# Altium PCB 驱动板PCB.PcbDoc
Units mil, origin at the board's own origin, x right, y up, seen from the top; angles counter-clockwise.
Board outline 3955.03 x 2772.03 mil, 2 copper layers (Top Layer, Bottom Layer); 5 components, 29 nets, 126 pads, 119 vias.
Unrouted connection lines stored in the file: 15.
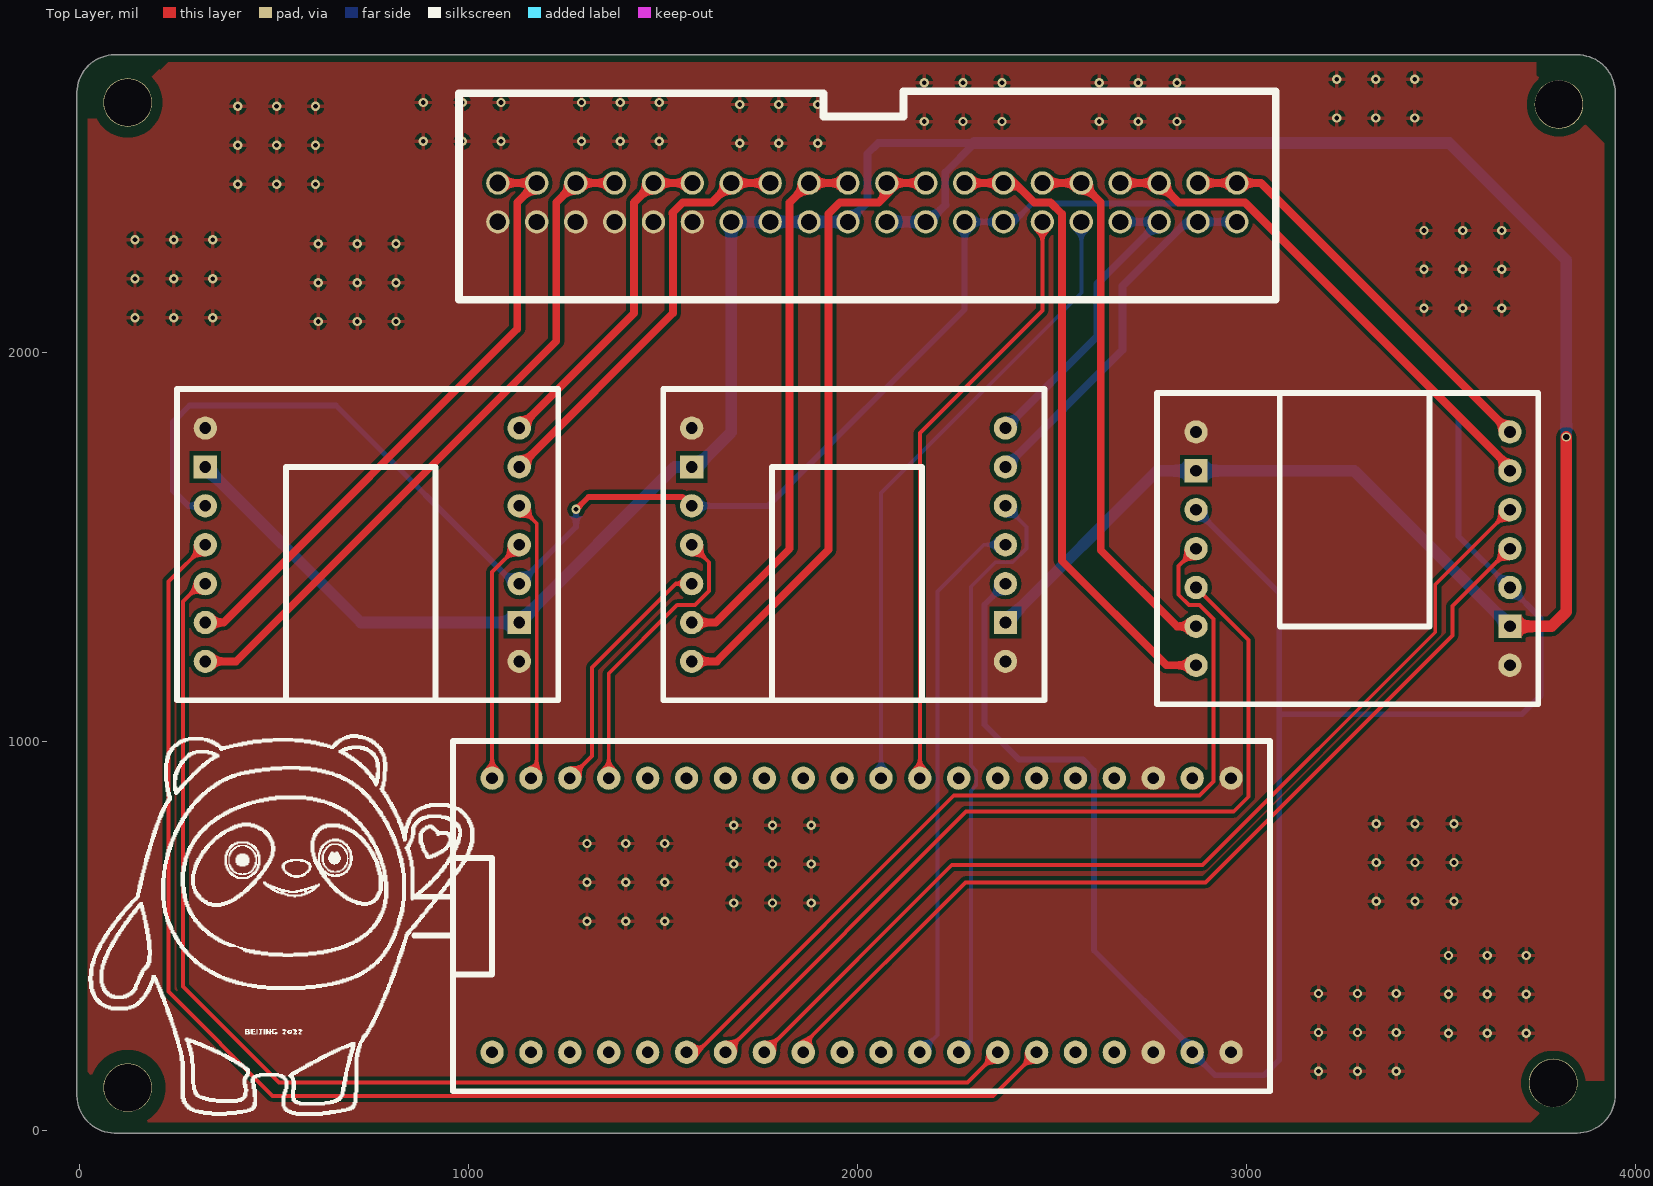
[diagram p0: Top Layer view]
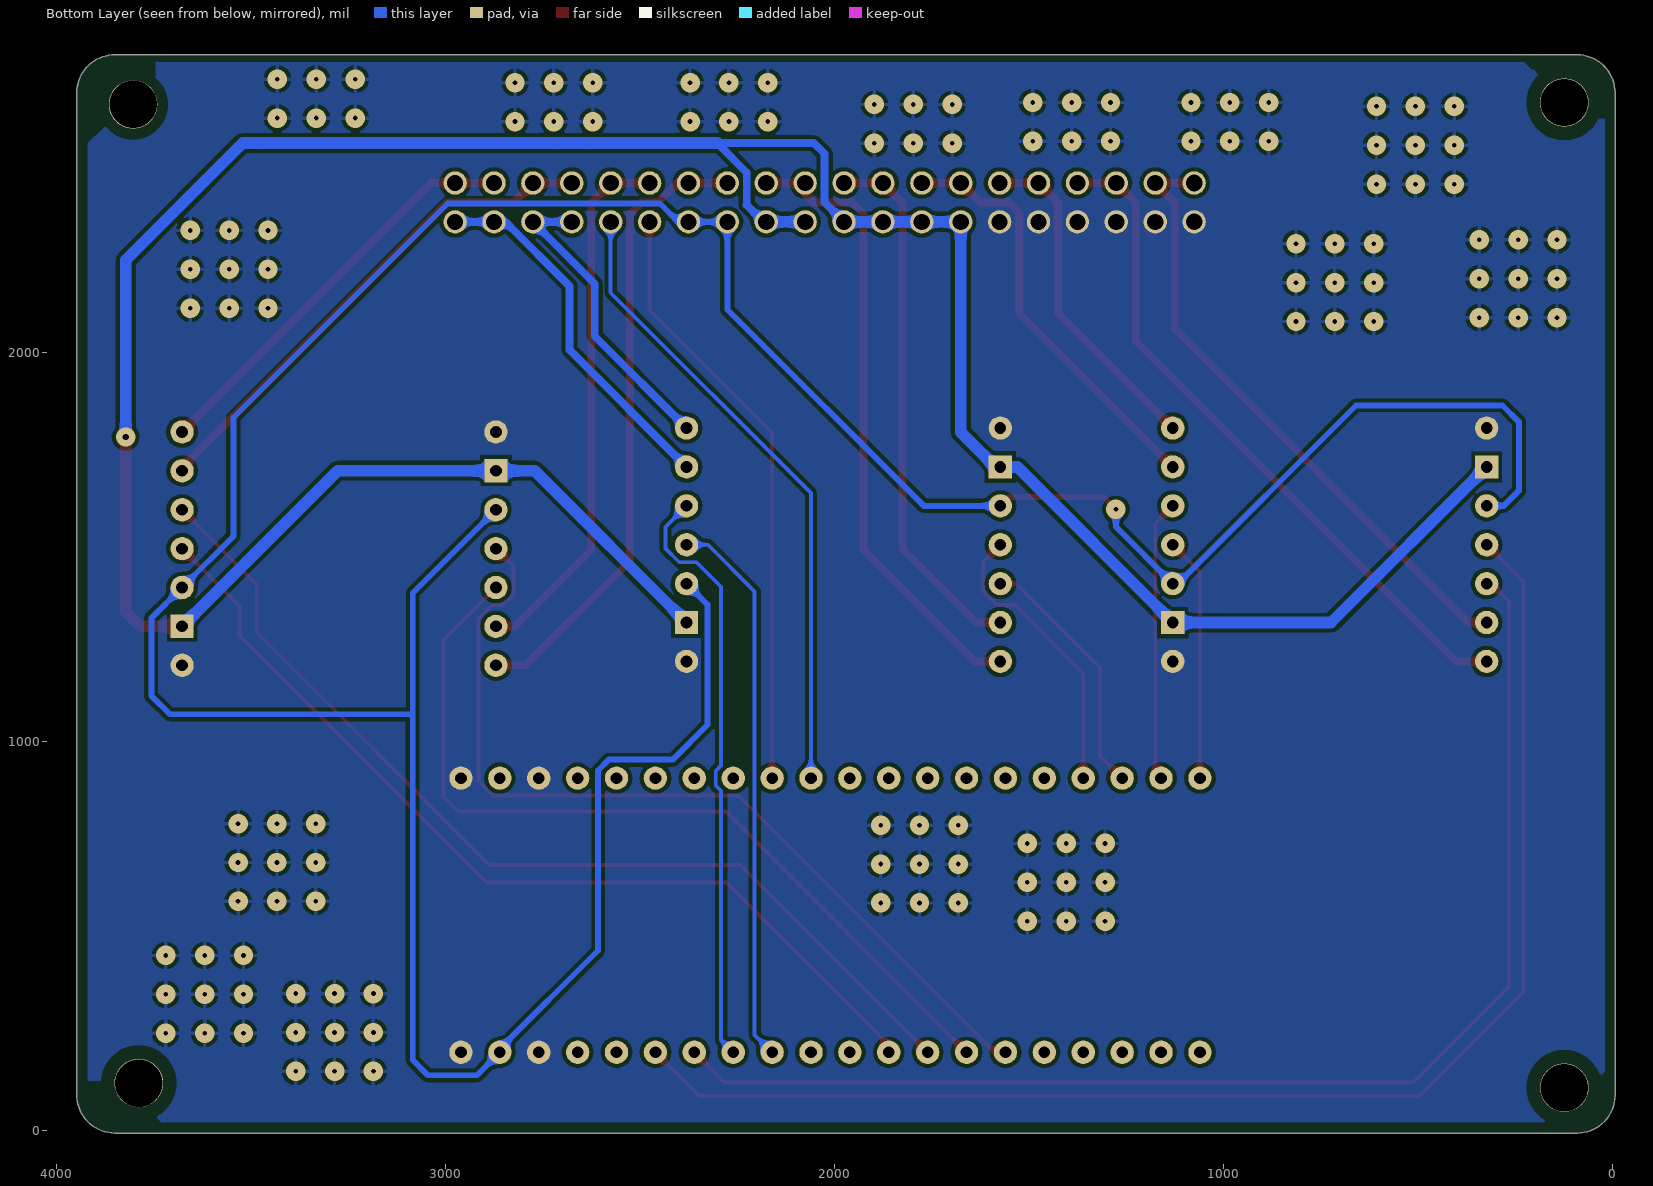
[diagram p1: Bottom Layer view, seen from below]

## Layer stack, top to bottom
Top Solder: solder mask 0.4, Solder Resist, Dk 3.5
Top Layer: signal copper 1.4
Dielectric 1: dielectric 12.6, FR-4, Dk 4.8
Bottom Layer: signal copper 1.4
Bottom Solder: solder mask 0.4, Solder Resist, Dk 3.5

## Board outline
88.62,-7.51 cw(c90,90) -7.51,88.62 cw(c0,89) -7.51,89 -7.52,2668 cw(c0,2668) -7.51,2668.39 cw(c90,2667) 90,2764.51 cw(c90,2757) 91.68,2764.33 3848.32,2764.33 cw(c3850,2757) 3850,2764.51 cw(c3850,2667) 3947.51,2667 cw(c3940,2667) 3947.51,2666.96 3947.51,90 cw(c3850,90) 3850.04,-7.51 cw(c3850,90) 3850,-7.51 ccw(c3850,0) 3850.04,-7.51 3850,-7.51 89,-7.51 cw(c89,0)

## Design rules (kind name [scope] priority, off if disabled: settings)
Clearance [All] p1: gap=10 ignorepadtopadclearanceinfootprint=FALSE except(0: Arc-Hole Track-Hole SMDPad-Hole THPad-Hole Via-Hole Fill-Hole Poly-Hole Region-Hole Text-Hole)
HoleSize [All] p1: absolutevalues=TRUE maxlimit=150 minlimit=1 maxpercent=80.000 minpercent=20.000
PolygonConnect PolygonConnect_1 [All] p1: thpad.connectstyle=Direct thpad.reliefconductorwidth=10 thpad.reliefentries=4 thpad.polygonreliefangle="90 Angle" thpad.airgapwidth=10 smdpad.connectstyle=Relief smdpad.reliefconductorwidth=10 smdpad.reliefentries=4 smdpad.polygonreliefangle="90 Angle" smdpad.airgapwidth=10 via.connectstyle=Relief via.reliefconductorwidth=10 via.reliefentries=4 via.polygonreliefangle="90 Angle" via.airgapwidth=10
PolygonConnect [All] p2: connectstyle=Direct reliefconductorwidth=10 reliefentries=4 polygonreliefangle="90 Angle" airgapwidth=10
RoutingVias [All] p1: holewidth=28 width=50 viastyle="Through Hole" minholewidth=28 minwidth=50 maxholewidth=28 maxwidth=50
SolderMaskExpansion [All] p1: expansion=4
Width [All] p1: maxlimit=40 minlimit=10 preferedwidth=10
29 further rules are at their usual default settings.

## Classes and differential pairs
component class 驱动板原理图: ""

## Components (designator, comment, footprint, x,y, rotation, side; value= is the part's Value field where it differs from the comment)
*1 "A4950" A4950 3250,1250 r0 top
*2 "A4950" A4950 2000,1750 r180 top
*3 "A4950" A4950 750,1750 r180 top
*4 "STM32F401" STM32F401CCU6 2960,805 r90 top
*5 "40P" PCBComponent_1 2875,2435 r270 top

## Footprints (in the part's own frame and the unit in brackets; to place one, negate y for a bottom-side part, rotate by r counter-clockwise, add the part's x,y. Pads: shape width x height; smd on the part's side, far side on the other; paste and mask are expansions set on the pad)
A4950 [mil]
  round 60 hole 30: 1(-380,545) 3(-380,345) 4(-380,245) 5(-380,145) 6(-380,45) 7(-380,-55) 8(427,545) 9(427,445) 10(427,345) 11(427,245) 12(427,145) 14(427,-55)
  rect 60x60 hole 30: 2(-380,445) 13(427,45)
  silkscreen extent -480,-155 500,645
PCBComponent_1 [mil]
  round 60 hole 41.73: 1(0,100) 2(0,0) 3(0,-100) 4(0,-200) 5(0,-300) 6(0,-400) 7(0,-500) 8(0,-600) 9(0,-700) 10(0,-800) 11(0,-900) 12(0,-1000) 13(0,-1100) 14(0,-1200) 15(0,-1300) 16(0,-1400) 17(0,-1500) 18(0,-1600) 19(0,-1700) 21(100,100) 22(100,0) 23(100,-100) 24(100,-200) 25(100,-300) 26(100,-400) 27(100,-500) 28(100,-600) 29(100,-700) 30(100,-800) 31(100,-900) 32(100,-1000) 33(100,-1100) 34(100,-1200) 35(100,-1300) 36(100,-1400) 37(100,-1500) 38(100,-1600) 39(100,-1700)
  round 60 hole 42.52: 20(0,-1800) 40(100,-1800)
  silkscreen extent -236,-1900 300,200
STM32F401CCU6 [mil]
  round 60 hole 30: 1(-605,1900) 2(-605,1800) 3(-605,1700) 4(-605,1600) 5(-605,1500) 6(-605,1400) 7(-605,1300) 8(-605,1200) 9(-605,1100) 10(-605,1000) 11(-605,900) 12(-605,800) 13(-605,700) 14(-605,600) 15(-605,500) 16(-605,400) 17(-605,300) 18(-605,200) 19(-605,100) 20(-605,0) 21(100,1900) 22(100,1800) 23(100,1700) 24(100,1600) 25(100,1500) 26(100,1400) 27(100,1300) 28(100,1200) 29(100,1100) 30(100,1000) 31(100,900) 32(100,800) 33(100,700) 34(100,600) 35(100,500) 36(100,400) 37(100,300) 38(100,200) 39(100,100) 40(100,0)
  silkscreen extent -705,-100 195,2100

## Free pads (board coordinates)
  round 125 hole 122: 2(123.31,109) 2(123.31,2642) 2(3788.31,121) 2(3803,2637)

## Via types
v1: diameter 24/50 (per signal layer), hole 12, Top Layer to Bottom Layer, 118 vias
v2: diameter 24/50 (per signal layer), hole 16, Top Layer to Bottom Layer, 1 vias

## Nets (pads, with @x,y where several pads share a name; then routed paths per layer and width w, separated by ;. In a path a pad name is that pad's centre, name@x,y a point inside that pad or via, vN(x,y) a via of type N, cw(c..) or ccw(c..) an arc to the next point about the centre after c; other vN are vias at no path point)
5V: *1.3 *1.12 *2.3 *2.12 *3.3 *3.12 *4.19 *5.27 *5.28 | length 9407.8
  Top Layer w15: v1(1276,1596) 1308,1628 1550,1628 *2.12
  Bottom Layer w15: *3.12 279,1605 240,1644 240,1821 282,1863 659,1863 1117,1405 *3.3 1276,1551 v1(1276,1596) ; *2.12 1770,1605 2275,2110 *5.28 *5.27 2401,2335 2448.5,2382.5 2994.68,2382.5 3545,1832.18 3545,1527 *1.12 3756,1316 3756,1117 3708,1069 3089,1069 3084,1064 ; *2.3 2326,1351 2326,1042 2415.5,952.5 2579.68,952.5 2607.5,924.68 2607.5,461.5 2860,209 *4.19 2919,141 3045,141 3084,180 3084,1064 ; *1.3 3084,1381 3084,1064
12V: *1.2 *1.13 *2.2 *2.13 *3.2 *3.13 *5.29 *5.30 *5.31 *5.32 *5.33 *5.34 | length 7738.6
  Top Layer w30: *1.13 3784,1295 3822,1333 v2(3822,1782)
  Bottom Layer w20: *5.31 2025,2385 2025,2510 2053,2538 2300.22,2538 2300.22,2536.93 2225,2461.71 2225,2379 2225.5,2378.5 *5.29@2182,2335
  Bottom Layer w30: *3.13 723,1305 *3.2 1530,1705 *2.13 1586,1705 1675,1794 *5.34 *5.33 *5.32 *5.31 ; *5.30 *5.29 *5.29@2182,2335 ; 2300.22,2538 3521,2538 3822,2237 v2(3822,1782) ; *2.2 2770,1695 *1.2 3277,1695 *1.13
401R: *4.31 *5.25 | length 1643.3
  Bottom Layer w10: *4.31 2060,1638 2575,2153 *5.25
401T: *4.32 *5.26 | length 1560.5
  Top Layer w10: *4.32 2160,1792 2475,2107 *5.26
GND: *1.1 *1.14 *2.1 *2.14 *3.1 *3.14 *4.18 *4.20 *4.38 *4.40 *5.35 *5.36 *5.37 *5.38 *5.39 *5.40
  other v1: 3185,151 3285,151 3385,151 3519,249 3619,249 3719,249 3185,251 3285,251 3385,251 3519,349 3619,349 3719,349 3185,351 3285,351 3385,351 3519,449 3619,449 3719,449 1304,537 1404,537 1504,537 1681,584 1781,584 1881,584 3333,588 3433,588 3533,588 1304,637 1404,637 1504,637 1681,684 1781,684 1881,684 3333,688 3433,688 3533,688 1304,737 1404,737 1504,737 1681,784 1781,784 1881,784 3333,788 3433,788 3533,788 613,2079 713,2079 813,2079 142,2089 242,2089 342,2089 3456,2113 3556,2113 3656,2113 613,2179 713,2179 813,2179 142,2189 242,2189 342,2189 3456,2213 3556,2213 3656,2213 613,2279 713,2279 813,2279 142,2289 242,2289 342,2289 3456,2313 3556,2313 3656,2313 406,2432 506,2432 606,2432 406,2532 506,2532 606,2532 1697,2537 1797,2537 1897,2537 883,2542 983,2542 1083,2542 1290,2542 1390,2542 1490,2542 2171,2593 2271,2593 2371,2593 2621,2593 2721,2593 2821,2593 3232,2602 3332,2602 3432,2602 406,2632 506,2632 606,2632 1697,2637 1797,2637 1897,2637 883,2642 983,2642 1083,2642 1290,2642 1390,2642 1490,2642 2171,2693 2271,2693 2371,2693 2621,2693 2721,2693 2821,2693 3232,2702 3332,2702 3432,2702
M11: *1.4 *4.6 | length 2314.2
  Top Layer w10: *4.6 1587,200 2247,860 2878.64,860 2915,896.36 2915,1314 2879,1350 2851.36,1350 2825,1376.36 2825,1450 *1.4
M12: *1.5 *4.7 | length 2211.1
  Top Layer w10: *4.7 2279,819 2967,819 3005,857 3005,1260 *1.5
M21: *1.10 *4.8 | length 2566.9
  Top Layer w10: *4.8 2242,682 2887,682 3485,1280 3485,1403 *1.10
M22: *1.11 *4.9 | length 2409.1
  Top Layer w10: *4.9 1860,220 2277,637 2894,637 3529,1272 3529,1347 *1.11
M31: *2.4 *4.12 | length 1428.3
  Bottom Layer w10: *4.12 2205,245 2205,1385 2325,1505 *2.4
M32: *2.5 *4.13 | length 1537.2
  Bottom Layer w10: *4.13 2291,231 2291,872.36 2305,886.36 2305,923.64 2291,937.64 2291,1397 2354,1460 2398.64,1460 2434,1495.36 2434,1551 *2.5
M41: *3.10 *4.14 | length 3296.7
  Top Layer w10: *3.10 311,1405 265,1359 265,369 512,122 2282,122 *4.14
M42: *3.11 *4.15 | length 3577.8
  Top Layer w10: *3.11 228,1410 228,356 496,88 2348,88 *4.15
M51: *3.4 *4.21 | length 629
  Top Layer w10: *4.21 1060,1435 *3.4
M52: *3.5 *4.22 | length 724.9
  Top Layer w10: *3.5 1175,1560 1175,920 *4.22
M61: *2.10 *4.23 | length 653.1
  Top Layer w10: *4.23 1317,962 1317,1189 1533,1405 *2.10
M62: *2.11 *4.24 | length 752.2
  Top Layer w10: *4.24 1360,1174 1536,1350 1581.64,1350 1618,1386.36 1618,1460 *2.11
MO11: *1.8 *5.1 *5.2 | length 1067.1
  Top Layer w20: *5.2 *5.1 3037,2435 *1.8
MO12: *1.9 *5.3 *5.4 | length 1313.6
  Top Layer w20: *5.4 *5.3 2825,2385 2995.71,2385 3677,1703.71 *1.9
MO21: *1.6 *5.5 *5.6 | length 1390.9
  Top Layer w20: *5.6 *5.5 2625,2385 2625,1491 2821,1295 *1.6
MO22: *1.7 *5.7 *5.8 | length 1631
  Top Layer w20: *5.8 *5.7 2404,2435 2454,2385 2495.71,2385 2525,2355.71 2525,1464 2794,1195 *1.7
MO31: *2.8 *5.9 *5.10 | length 1634.6
  Top Layer w20: *2.8 1638,1205 1925,1492 1925,2355.71 1954.29,2385 2054.29,2385 2075,2405.71 *5.10 *5.9
MO32: *2.9 *5.11 *5.12 | length 1391.4
  Top Layer w20: *2.9 1635,1305 1825,1495 1825,2385 *5.12 *5.11
MO41: *3.6 *5.13 *5.14 | length 1100.3
  Top Layer w20: *3.6 1525,2100 1525,2355.71 1524,2356.71 1524,2358.71 1550.29,2385 1625,2385 *5.14 *5.13
MO42: *3.7 *5.15 *5.16 | length 872.9
  Top Layer w20: *3.7 1425,2100 1425,2385 *5.16 *5.15
MO51: *3.8 *5.17 *5.18 | length 1770.6
  Top Layer w20: *3.8 402,1205 1225,2028 1225,2385 *5.18 *5.17
MO52: *3.9 *5.19 *5.20 | length 1610.4
  Top Layer w20: *3.9 370,1305 1125,2060 1125,2385 *5.19 *5.20
MO61: *2.6 *5.21 *5.22 | length 952.2
  Bottom Layer w20: *2.6 2681,2006 2681,2170.29 2845.71,2335 *5.22 *5.21
MO62: *2.7 *5.23 *5.24 | length 793.6
  Bottom Layer w20: *2.7 2616,2041 2616,2176 *5.23 *5.24
pads on no net: *4.1 *4.2 *4.3 *4.4 *4.5 *4.10 *4.11 *4.16 *4.17 *4.25 *4.26 *4.27 *4.28 *4.29 *4.30 *4.33 *4.34 *4.35 *4.36 *4.37 *4.39

## Polygon pours and split planes (outlines as drawn)
GND on Bottom Layer (solid, remove dead copper, pour order 2): 206.1,2725.14 226.1,2745.14 3744.1,2745.14 3744.1,2712.14 3919.1,2537.14 3919.1,127.14 3837.1,127.14 3730.1,20.14 149.1,20.14 19.1,150.14 19.1,2600.14 76.1,2600.14 225.1,2749.14
GND on Top Layer (solid, remove dead copper, pour order 0): 207,2725 227,2745 3745,2745 3745,2712 3920,2537 3920,127 3838,127 3731,20 150,20 20,150 20,2600 77,2600 226,2749

## Other copper
Top Layer:
  pour cut-out: 3705.3,121 ccw(c3788.31,121) 3788.31,37.99 ccw(c3788.31,121) 3871.31,121 ccw(c3788.31,121) 3788.31,204.01 ccw(c3788.31,121)
  pour cut-out: 3719.99,2637 ccw(c3803,2637) 3803,2553.99 ccw(c3803,2637) 3886.01,2637 ccw(c3803,2637) 3803,2720.01 ccw(c3803,2637)
  pour cut-out: 123.31,2551.85 cw(c123.31,2642) 33.15,2642 cw(c123.31,2642) 123.31,2732.15 cw(c123.31,2642) 213.46,2642 cw(c123.31,2642)
  pour cut-out: 25.74,109 ccw(c123.31,109) 123.31,11.44 ccw(c123.31,109) 220.87,109 ccw(c123.31,109) 123.31,206.56 ccw(c123.31,109)
Bottom Layer:
  pour cut-out: 3712.85,2637 ccw(c3803,2637) 3803,2546.85 ccw(c3803,2637) 3893.15,2637 ccw(c3803,2637) 3803,2727.15 ccw(c3803,2637)
  pour cut-out: 3690.74,121 cw(c3788.31,121) 3788.31,218.56 cw(c3788.31,121) 3885.87,121 cw(c3788.31,121) 3788.31,23.44 cw(c3788.31,121)
  pour cut-out: 123.31,2544.44 cw(c123.31,2642) 25.74,2642 cw(c123.31,2642) 123.31,2739.56 cw(c123.31,2642) 220.87,2642 cw(c123.31,2642)
  pour cut-out: 25.74,109 ccw(c123.31,109) 123.31,11.44 ccw(c123.31,109) 220.87,109 ccw(c123.31,109) 123.31,206.56 ccw(c123.31,109)

## Silkscreen, mask and mechanical layers (free items; w line width, h text height)
Top Overlay:
  drawing of 3503 lines, arcs and shapes, not listed
Mechanical 1:
  lines w15: 0,89 0,2668 ; 0,90 ccw(c90,90) 90,0 ; 0,2667 cw(c90,2667) 90,2757 ; 89,0 3850,0 ccw(c3850,90) 3940,90 3940,2667 ccw(c3850,2667) 3850,2757 ; 90,2756.81 3850,2756.81